# Altium PCB SS_MB_CONV2.0.PcbDoc (part 3 of 4)
Units mil, origin at the board's own origin, x right, y up, seen from the top; angles counter-clockwise.
Board outline 5818.45 x 4760.12 mil, 4 copper layers (Top Layer, Internal Plane 1, Internal Plane 2, Bottom Layer), stack 30.634 mil thick; 381 components, 398 nets, 1514 pads, 801 vias.
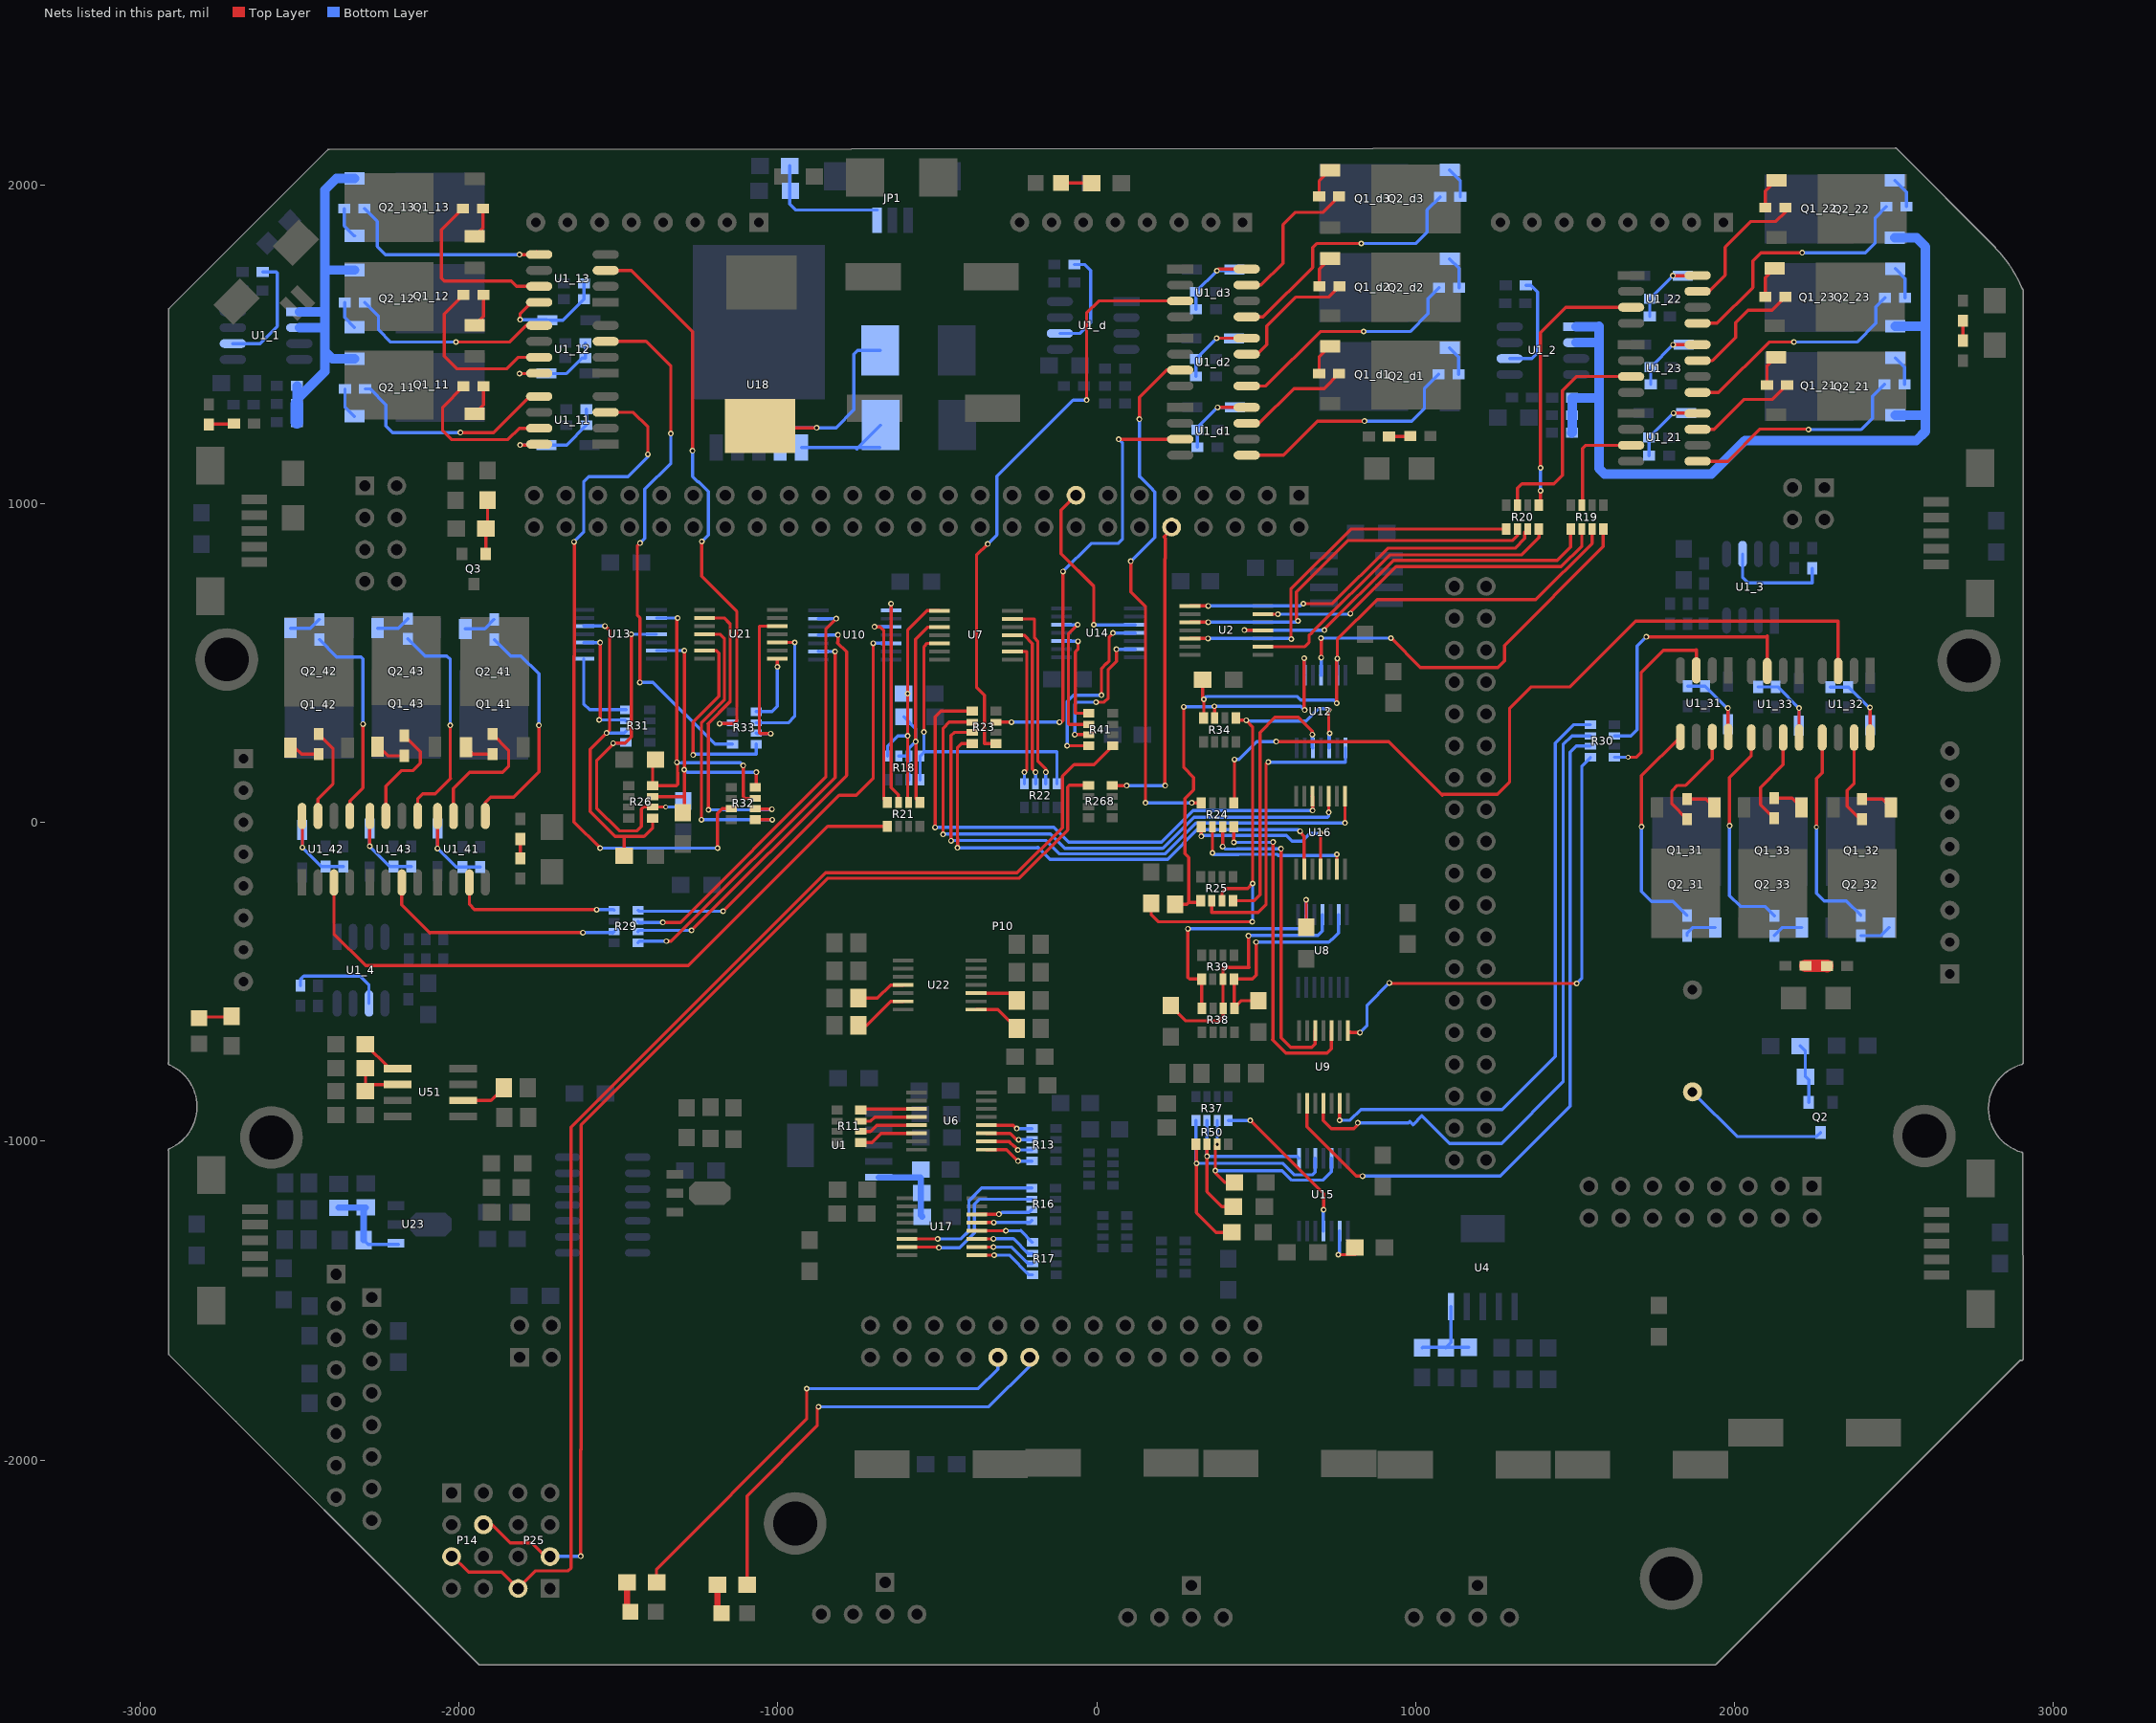
[diagram p5: the nets of this part, all layers, seen from the top]

## Via types
v1: diameter 18, hole 10, Top Layer to Bottom Layer, 606 vias
v2: diameter 25, hole 12, Top Layer to Bottom Layer, 77 vias
v3: diameter 15, hole 10, Top Layer to Bottom Layer, 44 vias
v4: diameter 20, hole 12, Top Layer to Bottom Layer, 43 vias
v5: diameter 50, hole 30, Top Layer to Bottom Layer, 28 vias
v6: diameter 30, hole 20, Top Layer to Bottom Layer, 1 vias
v7: diameter 40, hole 25, Top Layer to Bottom Layer, 1 vias
v8: diameter 30, hole 16, Top Layer to Bottom Layer, 1 vias

## Nets (pads, with @x,y where several pads share a name; then routed paths per layer and width w, separated by ;. In a path a pad name is that pad's centre, name@x,y a point inside that pad or via, vN(x,y) a via of type N, cw(c..) or ccw(c..) an arc to the next point about the centre after c; other vN are vias at no path point) (continued)
LED1: P10.81 R49.1 | length 1467.4
  Top Layer w10: R49.1@-1380.93,-2384 -1380.93,-2342.93 -910,-1872 v1(-910,-1776)
  Bottom Layer w10: v1@-912,-1776 v1(-910,-1776) -371,-1776 -310.19,-1715.19 P10.81@-310.19,-1677.85
LED2: P10.83 R47.1 | length 1394.8
  Top Layer w10: R47.1@-1096.93,-2392 -1096.93,-2113.07 -876.86,-1893 -876.86,-1836.86 v1(-873,-1833)
  Bottom Layer w10: v1(-873,-1833) -338,-1833 -210.19,-1705.19 P10.83@-210.19,-1677.85
Lin_11: R32.5 U1_11.3 | length 2206.2
  Top Layer w10: v1(-1640,881) -1639,880 -1639,523.26 -1640,522.26 -1640,2.1 v1(-1558,-79.9) ; U1_11.3@-1540.34,1287.36 -1454,1287.36 -1409.64,1243 -1408,1243 v1(-1408,1156) ; v1(-1189.64,-79.9) -1189.64,29.36 -1175,44 R32.5@-1146,44
  Bottom Layer w10: v1(-1640,881) -1609.41,911.59 -1609.41,1069.59 -1593.32,1085.68 -1470.32,1085.68 -1408,1148 v1(-1408,1156) ; v1(-1558,-79.9) v1(-1189.64,-79.9) v1@-1188,-78.26
Lin_12: R33.1 U1_12.3 | length 1646.1
  Top Layer w10: U1_12.3@-1540.34,1510 -1414,1510 -1336,1432 v1(-1336,1221) ; v1(-1433,440) -1433,494.85 -1432.85,495 -1432.85,642 -1441,650.15 -1441,869 v1(-1432.85,877.15)
  Bottom Layer w10: v1(-1433,440) -1392,440 -1198,246 R33.1@-1142.8,246 ; v1(-1432.85,877.15) -1418,892 -1418,1046 -1336,1128 v1(-1336,1221)
Lin_13: R33.5 U1_13.3 | length 1751.9
  Top Layer w10: U1_13.3@-1540.34,1732.64 -1460.14,1732.64 -1268,1540.5 v1(-1268,1167) ; v1(-1239,882) -1239,773 -1129,663 -1129,318 -1136.5,310.5 v1(-1183,310.5)
  Bottom Layer w10: v1(-1268,1167) -1268,1086 -1250.68,1068.68 -1247.99,1068.68 -1218.31,1039 -1218.31,902.69 v1(-1239,882) v1@-1241,880 ; v1(-1183,310.5) -1145.3,310.5 R33.5@-1142.8,313
Lin_21: R19.4 U1_21.3 | length 334.7
  Top Layer w10: R19.4@1524,995.8 1524,1174 1534,1184 U1_21.3@1676.34,1184
Lin_22: R20.8 U1_22.3 | length 862.7
  Top Layer w10: R20.8@1387,995.8 1392,1000.8 v1(1392,1041) ; v1(1392,1113) 1392,1538 1471,1617 U1_22.3@1676.34,1617
  Bottom Layer w10: v1(1392,1113) v1(1392,1041) v1@1393,1042
Lin_23: R20.4 U1_23.3 | length 710.6
  Top Layer w10: R20.4@1320,995.8 1320,1049 1334,1063 1434,1063 1461,1090 1461,1356 1504.7,1399.7 U1_23.3@1676.34,1399.7
Lin_31: R30.2 U1_31.3 | length 609.3
  Top Layer w10: v3(1667,205) 1692,205 1708.14,221.14 1708.14,471.64 1777.5,541 1879,541 1881,543 U1_31.3@1881,477.6
  Bottom Layer w10: R30.2@1623.8,205 v3(1667,205)
Lin_32: R24.8 U1_32.3 | length 2647.7
  Top Layer w10: R24.8@430,61.8 437,68.8 432,73.8 v1(432,198) ; v1(563,254) 915.85,254 1084,85.85 1084,89 1257,89 1295,127 1295,358 1363,426 1485,426 1690.94,631.94 2326,631.94 U1_32.3@2326,475.61
  Bottom Layer w10: v1(432,198) 446,198 502,254 v1(563,254)
Lin_33: R30.6 U1_33.3 | length 874.1
  Top Layer w10: v1(1724,583) 2100.36,583 2103.36,586 U1_33.3@2103.36,475.61
  Bottom Layer w10: R30.6@1623.8,272 1676,272 1695,291 1695,554 v1(1724,583)
Lin_41: R29.7 U1_41.3 | length 530.4
  Top Layer w10: U1_41.3@-1968,-188 -1968,-256.96 -1951.96,-273 v1(-1569,-273)
  Bottom Layer w10: v1(-1569,-273) -1516,-273 R29.7@-1514,-275
Lin_42: R21.1 U1_42.3 | length 2119.5
  Top Layer w10: U1_42.3@-2393,-188 -2393,-349 -2293,-449 -1281.08,-449 -843.89,-11.8 R21.1@-657,-11.8
Lin_43: R29.3 U1_43.3 | length 774.6
  Top Layer w10: U1_43.3@-2180,-188 -2180,-257.5 -2091.5,-346 -2090.5,-345 v1(-1612,-345)
  Bottom Layer w10: v1(-1612,-345) -1519,-345 -1518,-346 R29.3@-1514,-342
Lin_d1: R23.4 U1_d1.3 | length 1423.1
  Top Layer w10: R23.4@-316,315 v1(-267.19,315) v1@-265.19,313 ; v1(-117,315) -111,315 -106,320 v1(-106,788) ; v1(69,1203) 152.96,1203 153,1202.96 U1_d1.3@262,1202.96
  Bottom Layer w10: v1(-267.19,315) v1(-117,315) ; v1(-106,788) -18,876 67,876 81,890 81,1191 v1(69,1203)
Lin_d2: R24.2 U1_d2.3 | length 1681.9
  Top Layer w10: v1(107,820) 107,723.04 153,677.04 v1(153,62) ; v1(134,1266) 134,1335 218.96,1419.96 U1_d2.3@262,1419.96 ; v1(298,62) 327.8,62 R24.2@328,61.8
  Bottom Layer w10: v1(107,820) 182,895 182,1038 176.34,1043.66 176.34,1044.35 135.01,1085.68 134,1085.68 v1(134,1266) ; v1(153,62) v1(298,62)
Lin_d3: R23.8 U1_d3.3 | length 1874.6
  Top Layer w10: v1(-342,874) -377,839 -377,425 -352,400 -352,248 R23.8@-316,248 ; v1(-32,1326) -32,1599 5.96,1636.96 U1_d3.3@262,1636.96
  Bottom Layer w10: v1(-342,874) -313,903 -313,1087 -74,1326 v1(-32,1326)
MISO: P14.5 P25.2 R41.8 | length 4126.8
  Top Layer w10: P14.5@-2023.83,-2303.22 -2023.83,-2299.05 -1970.88,-2352 -1866.22,-2352 P25.2@-1815,-2403.22 P25.2@-1815,-2403.22 -1759.73,-2347.88 -1657.66,-2347.88 -1649,-2339.22 -1649,-956 -850.5,-157.5 -249.5,-157.5 -108,-16 -108,145.2 -70.86,182.34 -8.86,182.34 R41.8@49.8,241
  Bottom Layer w10: P14.5@-2023.83,-2303.22 P14.5@-2018,-2303.22
MISO_F: P10.15 U14.10 | length 598.9
  Top Layer w10: P10.15@-65.19,1027.15 -65.19,1026.81 -112,980 -112,844 -9,741 v1(-9,621)
  Bottom Layer w10: v1(-9,621) -8.59,620.59 U14.10@118,620.59 U14.10@121.5,620.59
MOSI: P14.4 P25.3 R268.8 | length 3813.5
  Top Layer w10: P14.4@-1923.83,-2203.22 -1897,-2203.22 -1840,-2260.22 -1772,-2260.22 -1729,-2303.22 P25.3@-1715,-2303.22 ; v1(-1619,-2302.22) -1619,-1967 ; -1618,-1968 -1618,-949.04 -843.46,-174.5 -242.46,-174.5 -91,-23.04 -91,112 -86,117 R268.8@-26,117
  Bottom Layer w10: P25.3@-1715,-2303.22 -1714,-2302.22 v1(-1619,-2302.22)
MOSI_F: P10.10 R268.7 | length 990.9
  Top Layer w10: R268.7@48.8,117 49.8,116 v1(94,116) ; v1(215,116) 214,117 214,828.08 215,829.08 215,891.96 210,896.96 234.81,921.77 P10.10@234.81,927.15
  Bottom Layer w10: v1(94,116) v1(215,116)
NetC1_11_1: C1_11.1 C2_11.1 D1_11.K U1_11.8 | length 344.7
  Top Layer w10: v1(-1809,1185) -1751.36,1185 U1_11.8@-1749,1187.36
  Bottom Layer w10: v1(-1809,1185) D1_11.K@-1725.86,1185 -1663,1185 C2_11.1@-1601,1247 C1_11.1@-1601,1297
NetC1_12_1: C1_12.1 C2_12.1 D1_12.K U1_12.8 | length 336.7
  Top Layer w10: v1(-1811,1409) -1750,1409 U1_12.8@-1749,1410
  Bottom Layer w10: v1(-1811,1409) D1_12.K@-1725.86,1409 -1663.24,1409 -1614.24,1458 C1_12.1@-1604,1458 C2_12.1@-1604,1505
NetC1_13_1: C1_13.1 C2_13.1 D1_13.K U1_13.8 | length 371.8
  Top Layer w10: v1(-1809,1578) -1809,1596 -1772.36,1632.64 U1_13.8@-1749,1632.64
  Bottom Layer w10: v1(-1809,1578) -1724.86,1578 D1_13.K@-1722.86,1576 -1674.5,1576 C2_13.1@-1608.5,1642 C1_13.1@-1608.5,1692
NetC1_21_1: C1_21.1 C2_21.1 D1_21.K U1_21.8 | length 279.9
  Top Layer w10: v1(1809.66,1285) 1884,1285 U1_21.8@1885,1284
  Bottom Layer w10: C2_21.1@1732.5,1152 1733.16,1152.66 C1_21.1@1733.16,1208.5 v1(1809.66,1285) D1_21.K@1848.86,1285
NetC1_22_1: C1_22.1 C2_22.1 D1_22.K U1_22.8 | length 267.4
  Top Layer w10: v1(1807.5,1716) 1884,1716 U1_22.8@1885,1717
  Bottom Layer w10: C2_22.1@1735,1588 1735,1643.5 C1_22.1@1735.5,1644 v1(1807.5,1716) D1_22.K@1839,1716
NetC1_23_1: C1_23.1 C2_23.1 D1_23.K U1_23.8 | length 265
  Top Layer w10: v1(1808,1499.7) U1_23.8@1885,1499.7
  Bottom Layer w10: C1_23.1@1738,1374.7 C2_23.1@1738,1429.7 v1(1808,1499.7) D1_23.K@1842,1499.7
NetC1_31_1: C1_31.1 C2_31.1 D1_31.K U1_31.8 | length 296.2
  Top Layer w10: v1(1980,359) 1980,269.94 U1_31.8@1981,268.94
  Bottom Layer w10: C1_31.1@1853.7,427.94 C2_31.1@1908.7,427.94 1977.64,359 v1(1980,359) D1_31.K@1980,308.08
NetC1_32_1: C1_32.1 C2_32.1 D1_32.K U1_32.8 | length 297.7
  Top Layer w10: U1_32.8@2426,266.95 v1(2426,361.2)
  Bottom Layer w10: C1_32.1@2301.7,424.94 C2_32.1@2356.7,424.94 2358.26,424.94 2426,357.2 D1_32.K@2426,306.08
NetC1_33_1: C1_33.1 C2_33.1 D1_33.K U1_33.8 | length 303.5
  Top Layer w10: v1(2203,359.2) 2203,267.31 U1_33.8@2203.36,266.95
  Bottom Layer w10: C1_33.1@2074.7,425.94 C2_33.1@2129.7,425.94 2136.26,425.94 v1(2203,359.2) D1_33.K@2203,304.08
NetC1_41_1: C1_41.1 C2_41.1 D1_41.K U1_41.8 | length 321.8
  Top Layer w10: v1(-2068,-81) U1_41.8@-2068,20.66
  Bottom Layer w10: D1_41.K@-2068,-18.14 v1(-2068,-81) -2010,-139 C2_41.1@-1989.7,-139 C1_41.1@-1934.7,-139
NetC1_42_1: C1_42.1 C2_42.1 D1_42.K U1_42.8 | length 307.5
  Top Layer w10: U1_42.8@-2493,20.66 -2492,19.66 v1(-2492,-78.26)
  Bottom Layer w10: D1_42.K@-2492,-23.14 v1(-2492,-78.26) -2432.26,-138 C2_42.1@-2418.7,-138 C1_42.1@-2363.7,-138
NetC1_43_1: C1_43.1 C2_43.1 D1_43.K U1_43.8 | length 307.2
  Top Layer w10: v1(-2281,-74.26) -2281,19.66 U1_43.8@-2280,20.66
  Bottom Layer w10: D1_43.K@-2281,-19.14 v1(-2281,-74.26) -2217.26,-138 C2_43.1@-2205.7,-138 C1_43.1@-2150.7,-138
NetC1_d1_1: C1_d1.1 C2_d1.1 D1_d1.K U1_d1.8 | length 298
  Top Layer w10: v1(378.88,1303) v1(378.88,1303) U1_d1.8@470.66,1302.96
  Bottom Layer w10: C1_d1.1@316,1178 C2_d1.1@316,1233 316,1240.12 v1(378.88,1303) D1_d1.K@434,1303
NetC1_d2_1: C1_d2.1 C2_d2.1 D1_d2.K U1_d2.8 | length 296.4
  Top Layer w10: v1(376.26,1519.96) U1_d2.8@470.66,1519.96
  Bottom Layer w10: C1_d2.1@311,1399.7 C2_d2.1@311,1454.7 v1(376.26,1519.96) D1_d2.K@431,1519.96
NetC1_d3_1: C1_d3.1 C2_d3.1 D1_d3.K U1_d3.8 | length 301.1
  Top Layer w10: v1(376.88,1731.58) 382.26,1736.96 U1_d3.8@470.66,1736.96
  Bottom Layer w10: C1_d3.1@311,1610.7 C2_d3.1@311,1665.7 v1(376.88,1731.58) 427.58,1731.58 D1_d3.K@432,1736
NetC7_2: C7.2 R2.2 R8.1 U1.5 | length 256.9
  Bottom Layer w20: U1.5@-684,-1113 -554,-1113 -552,-1115 -552,-1232 R8.1@-547,-1237
NetC18_1: C18.1 JP1.1 R167.1 | length 402
  Bottom Layer w10: R167.1@-963.36,2060.76 -963.36,1985.36 -963,1985 -963,1941 -944.2,1922.2 JP1.1@-688.7,1922.2
NetC44_1: C44.1 R18.3 R18.5 R18.6 R21.8 U7.3 | length 862.2
  Top Layer w10: R21.8@-555,63 -567.17,75.17 -567.17,253.17 v1(-568,254) -568,575 -529.41,613.59 U7.3@-493,613.59
  Bottom Layer w10: R18.3@-621,209 R18.5@-589,209 ; C44.1@-605,332 -568,295 v1(-568,254) -589,233 R18.5@-589,209 ; R18.6@-589,134.2 R18.5@-589,209
NetC52_1: C52.1 R19.5 R34.2 U12.13 | length 1781.9
  Top Layer w10: C52.1@332,448 332,383.81 335.19,387 v1(336,387) 336,328.8 R34.2@335,327.8 ; v1(753,375) 753,513 v1(755,515) 755,574.18 754.59,574.59 879.62,699.62 1377.62,699.62 1554,876 R19.5@1554,921
  Bottom Layer w10: v1(336,387) 345,396 628.01,396 639.98,384.02 743.98,384.02 v1(753,375) ; U12.13@754.59,462.5 755,462.09 v1(755,515)
NetC53_1: C53.1 R25.5 R34.8 U12.3 | length 1620.4
  Top Layer w10: C53.1@171,-253 171,-290 192,-311 v1(488,-311) ; R25.5@393,-245 393,-220.28 406.28,-207 473,-207 v1(489,-191) 489,301 v1(469,321) 443.8,321 R34.8@437,327.8 ; v1(728,354) 728,281 729,280 v1(731,280)
  Bottom Layer w10: v1(469,321) 472,318 656.85,318 695.85,357 725,357 v1(728,354) ; v1(488,-311) 489,-310 v1(489,-191) ; U12.3@729,238 731,240 v1(731,280) 729,278 U12.3@729,238 ; U12.3@729,238 U12.3@729,234 731,236 U12.3@729,238
NetC54_1: C54.1 R18.1 R21.6 U7.1 | length 794.8
  Top Layer w10: U7.1@-493,664.77 -532.82,664.77 -593,604.59 v1(-593,405) v1(-593,272) R21.6@-593,76.96 ; R21.6@-593,76.96 -593,66 R21.6@-590,63 -584.52,68.48 R21.6@-593,76.96
  Bottom Layer w10: R18.1@-656,209 -656,240 -624,272 v1(-593,272)
NetC55_1: C55.1 R25.1 R34.4 U12.9 | length 1368.3
  Top Layer w10: C55.1@246,-256 283,-256 289,-250 ; v1(273,363) 273,173.04 304,142.04 304,103 277,76 277,-96 276,-97 289,-110 289,-250 ; R25.1@326,-245 321,-250 289,-250 ; v1(369,365) 370,364 R34.4@370,327.8 ; v1(650.82,516) 650.82,354.18 v1(652,353)
  Bottom Layer w10: v1(273,363) 368.54,363 369,363.46 v1(369,365) 640,365 v1(652,353) ; v1(650.82,516) 650.82,463.91 U12.9@652.23,462.5
NetC57_1: C57.1 R37.6 R50.4 U15.5 | length 668.2
  Top Layer w10: v1(378,-1009.61) 372,-1015.61 v1(372,-1092) 372,-1098 403.28,-1129.28 C57.1@432,-1129.28
  Bottom Layer w10: v1(372,-1092) 581.96,-1092 611.96,-1122 709.41,-1122 736.41,-1095 U15.5@736.41,-1053.5 ; v1(378,-1009.61) R37.6@378,-934.8
NetC58_1: C58.1 R26.7 R32.4 U13.9 | length 1106
  Top Layer w10: C58.1@-1384,197 -1393,188 R26.7@-1393,116 -1319,116 -1314.82,120.18 -1314.82,157.12 -1315,157.3 -1315,188.82 -1315.18,189 v1(-1317,189) -1317,640 v1(-1314.82,642.18) ; v1(-1109,179) -1109,82 -1103,76 R32.4@-1071.2,76
  Bottom Layer w10: U13.9@-1381,642.18 v1(-1314.82,642.18) ; v1(-1317,189) -1315,187 -1303.28,187 -1302.28,188 -1118,188 v1(-1109,179)
NetC59_1: C59.1 R38.2 R39.1 U8.9 | length 839.1
  Top Layer w10: v1(286,-333) 286,-486 291,-491 R39.1@329,-491 329,-582 R38.2@330,-583 ; v1(656.64,-242.36) 657,-242.72 C59.1@657,-329
  Bottom Layer w10: v1(286,-333) 657,-333 657,-288.86 U8.9@656.64,-288.5 v1(656.64,-242.36)
NetC60_1: C60.1 R26.5 R32.2 U13.13 | length 974.7
  Top Layer w10: R26.5@-1393,81 -1293.68,81 ; C60.1@-1298,31.13 -1293.68,35.45 -1293.68,81 ; v1(-1293.68,539.82) -1293.68,81 ; R32.2@-1071.2,111 -1068,114.2 v1(-1068,158)
  Bottom Layer w10: U13.13@-1381,539.82 v1(-1293.68,539.82) ; v1(-1294,166) -1292,166 -1284,158 v1(-1068,158)
NetC61_1: C61.1 R37.4 R50.6 U15.1 | length 652.8
  Top Layer w10: R50.6@346,-1009.61 v1(346,-1047) 346,-1158 393,-1205 C61.1@428,-1205
  Bottom Layer w10: R37.4@346,-934.8 v1(346,-1047) 627.55,-1047 U15.1@634.05,-1053.5
NetC62_1: C62.1 R26.3 R31.8 U13.11 | length 1098.6
  Top Layer w10: v1(-1460,591) -1460,561.21 -1460.21,561 -1460.21,268.59 -1479.8,249 v1(-1517,249) -1517,246 -1569,194 -1569,44.86 -1498.14,-26 -1442,-26 -1428,-12 -1428,43 -1422,49 R26.3@-1393,49 v3(-1352,49)
  Bottom Layer w10: v1(-1517,249) -1479.8,249 R31.8@-1476.8,252 ; v1@-1461,590 v1(-1460,591) U13.11@-1381,591 ; v3(-1352,49) C62.1@-1298,49
NetC63_1: C63.1 R37.2 R50.8 U15.3 | length 922.8
  Top Layer w10: R50.8@311,-1009.61 313,-1011.61 v1(313,-1069) 313,-1223 312,-1224 374,-1286 C63.1@424,-1286
  Bottom Layer w10: R37.2@311,-934.8 311,-1068 312,-1069 v1(313,-1069) 583,-1069 619,-1105 677,-1105 685.23,-1096.77 U15.3@685.23,-1053.5
NetC64_1: C64.1 R26.1 R31.6 U13.5 | length 1075.8
  Top Layer w10: v1(-1543,617) -1528,602 -1528,291 v1(-1538,281) -1589,230 -1589,34.59 -1511.41,-43 -1485,-43 ; C64.1@-1482,-104 -1482,-46 -1485,-43 ; R26.1@-1393,14 -1393,-16 -1420,-43 -1485,-43
  Bottom Layer w10: U13.5@-1609.5,616.59 -1609.09,617 v1(-1543,617) ; v1(-1538,281) -1482.8,281 R31.6@-1476.8,287
NetC65_1: C65.1 R38.8 R39.7 U8.13 | length 683.9
  Top Layer w10: v1(500,-375) 500,-479 488,-491 R39.7@431,-491 431,-582 454.15,-558.85 C65.1@507,-558.85
  Bottom Layer w10: v1(500,-375) 728,-375 736,-367 737,-368 759,-346 U8.13@759,-288.5
NetC66_1: C66.1 R38.6 R39.5 U8.11 | length 816
  Top Layer w10: C66.1@232,-574 280,-622 383,-622 397,-608 R38.6@397,-583 396,-582 R39.5@396,-491 396,-456 397,-455 478,-455 476,-453 v1(476,-355)
  Bottom Layer w10: v1(476,-355) 477,-354 694,-354 707.82,-340.18 U8.11@707.82,-288.5
NetC68_2: C68.2 R46.2 R48.1 U4.5 | length 282.5
  Bottom Layer w10: R48.1@1021,-1648 1023,-1646 R46.2@1097,-1646 ; R46.2@1095,-1648 R46.2@1097,-1646 ; U4.5@1111,-1519 1111,-1632 R46.2@1097,-1646 ; C68.2@1167,-1646 R46.2@1097,-1646
NetC75_1: C75.1 R93.1 R94.2 U23.1 | length 302.1
  Bottom Layer w10: R94.2@-2299.6,-1310 -2285.6,-1324 U23.1@-2191.25,-1324
  Bottom Layer w20: R93.1@-2378,-1208.4 -2294,-1208.4 -2299.6,-1214 C75.1@-2299.6,-1232 ; R94.2@-2299.6,-1310 C75.1@-2299.6,-1232 ; C75.1@-2299.54,-1232.06 C75.1@-2299.6,-1232
NetC80_1_2: C80_1.2 U1_1.6 | length 376.5
  Bottom Layer w10: U1_1.6@-2710,1503 -2625,1503 -2570.5,1557.5 -2570.5,1724.5 -2574,1728 C80_1.2@-2616.5,1728
NetC80_2_2: C80_2.2 U1_2.6 | length 331.8
  Bottom Layer w10: U1_2.6@1295.34,1456 1365,1456 1383,1474 1383,1665 1362,1686 C80_2.2@1346,1686
NetC80_3_2: C80_3.2 U1_3.6 | length 345.9
  Bottom Layer w10: U1_3.6@2026,842.94 2026,770 2044.06,751.94 2245,751.94 ; 2245,751.44 2245,751.94 ; C80_3.2@2245,797.94 2245,751.94
NetC80_4_2: C80_4.2 U1_4.6 | length 308.8
  Bottom Layer w10: C80_4.2@-2497.9,-512 -2497.9,-491.9 -2487.5,-481.5 -2311.5,-481.5 -2283.04,-509.96 U1_4.6@-2283.04,-567.66
NetC80_d_2: C80_d.2 U1_d.6 | length 333.2
  Bottom Layer w10: U1_d.6@-115.66,1535 -53,1535 -19,1569 -19,1733 -37,1751 C80_d.2@-70,1751
NetD1_2: D1.2 U18.1 | length 351.4
  Bottom Layer w10: U18.1@-926.14,1176.66 -748.42,1176.66 ; -753.42,1171.66 -748.42,1176.66 ; D1.2@-681.42,1176.66 -748.42,1176.66 ; D1.2@-678,1247.08 -748.42,1176.66
NetD4_2: D4.2 L1.1 U18.2 | length 756.6
  Top Layer w10: L1.1@-1056.5,1245 -1044.5,1257 -1026.5,1239 v1(-879,1239)
  Bottom Layer w10: U18.2@-993.07,1176.66 -993.07,1216.93 -971,1239 v1(-879,1239) -818,1239 -762,1295 -762,1470 -749.92,1482.08 D4.2@-679,1482.08
NetDS1_1: DS1.1 R6.2 | length 95.7
  Top Layer w10: DS1.1@-111.73,2006.96 R6.2@-16,2006.96
NetDS2_2: DS2.2 R49.2 | length 96.6
  Top Layer w20: R49.2@-1473.93,-2384 -1473.93,-2465 DS2.2@-1462.93,-2476
NetDS3_2: DS3.2 R47.2 | length 94.4
  Top Layer w20: R47.2@-1189.93,-2392 -1189.93,-2468 DS3.2@-1176.93,-2481
NetDS4_1: DS4.1 R272.1 | length 92
  Top Layer w10: DS4.1@-2803,-610 R272.1@-2711,-610
NetLED1_1_2: LED1_1.2 R105_1.2 | length 74
  Top Layer w10: R105_1.2@-2782,1250.5 LED1_1.2@-2708,1250.5
NetLED1_2_2: LED1_2.2 R105_2.2 | length 62
  Top Layer w10: R105_2.2@2717,1512.5 LED1_2.2@2717,1574.5
NetLED1_3_2: LED1_3.2 R105_3.2 | length 68.4
  Top Layer w40: LED1_3.2@2223.5,-449.06 2290.5,-449.06 R105_3.2@2291.5,-450.06
NetLED1_4_2: LED1_4.2 R105_4.2 | length 61
  Top Layer w10: R105_4.2@-1807.73,-112.4 LED1_4.2@-1807.73,-51.4
NetLED1_d_2: LED1_d.2 R105_d.2 | length 67.4
  Top Layer w10: R105_d.2@917,1212 983,1212 LED1_d.2@984,1213
NetLS1_2: LS1.2 Q2.3 | length 455.4
  Bottom Layer w10: LS1.2@1876,-852 2009,-985 2258.24,-985 Q2.3@2271,-972.24
NetQ1_11_1: Q1_11.1 R1_11.2 | length 97.4
  Top Layer w10: Q1_11.1@-1951,1283.04 -1923.5,1310.54 R1_11.2@-1923.5,1369
NetQ1_12_1: Q1_12.1 R1_12.2 | length 106.4
  Top Layer w10: Q1_12.1@-1951,1561 -1923.5,1588.5 R1_12.2@-1923.5,1656
NetQ1_13_1: Q1_13.1 R1_13.2 | length 97.6
  Top Layer w10: Q1_13.1@-1951,1840 -1925.5,1865.5 R1_13.2@-1925.5,1927
NetQ1_21_1: Q1_21.1 R1_21.2 | length 98.7
  Top Layer w10: R1_21.2@2102.5,1373 2102.5,1431.74 Q1_21.1@2130.76,1460
NetQ1_22_1: Q1_22.1 R1_22.2 | length 100.2
  Top Layer w10: R1_22.2@2097.5,1930 2097.5,1981.42 Q1_22.1@2132,2015.92
NetQ1_23_1: Q1_23.1 R1_23.2 | length 100.8
  Top Layer w10: R1_23.2@2097.5,1650 2097.5,1710.5 Q1_23.1@2126,1739
NetQ1_31_1: Q1_31.1 R1_31.2 | length 95.6
  Top Layer w10: R1_31.2@1852,73.44 1911.5,73.44 Q1_31.1@1937,47.94
NetQ1_32_1: Q1_32.1 R1_32.2 | length 100.9
  Top Layer w10: R1_32.2@2400.96,73.44 2464.58,73.44 Q1_32.1@2490.92,47.1
NetQ1_33_1: Q1_33.1 R1_33.2 | length 98.2
  Top Layer w10: R1_33.2@2125,76.44 2181.5,76.44 Q1_33.1@2211,46.94
NetQ1_41_1: Q1_41.1 R1_41.2 | length 92.9
  Top Layer w10: Q1_41.1@-1979,236 -1957.5,214.5 R1_41.2@-1895,214.5
NetQ1_42_1: Q1_42.1 R1_42.2 | length 97.4
  Top Layer w10: Q1_42.1@-2529.92,235 -2514.6,235 -2494.1,214.5 R1_42.2@-2441,214.5
NetQ1_43_1: Q1_43.1 R1_43.2 | length 95.8
  Top Layer w10: Q1_43.1@-2255.96,238.16 -2252.16,238.16 -2223.65,209.65 R1_43.2@-2172,209.65
NetQ1_d1_1: Q1_d1.1 R1_d1.2 | length 100.2
  Top Layer w10: R1_d1.2@697.5,1409 697.5,1460.42 Q1_d1.1@732,1494.92
NetQ1_d2_1: Q1_d2.1 R1_d2.2 | length 100.8
  Top Layer w10: R1_d2.2@698.5,1683 698.5,1736.42 Q1_d2.1@732,1769.92
NetQ1_d3_1: Q1_d3.1 R1_d3.2 | length 96.3
  Top Layer w10: R1_d3.2@697.5,1965 697.5,2012.5 Q1_d3.1@732,2047
NetQ2_1: Q2.1 R3.2 R4.1 | length 187.8
  Bottom Layer w10: R3.2@2207,-701 2223,-717 R4.1@2223,-797 2233.6,-807.6 Q2.1@2233.6,-877.76
NetQ2_11_1: Q2_11.1 R2_11.2 | length 98.2
  Bottom Layer w10: R2_11.2@-2358.5,1361 -2358.5,1304.74 Q2_11.1@-2328.84,1275.08
NetQ2_12_1: Q2_12.1 R2_12.2 | length 90.7
  Bottom Layer w10: R2_12.2@-2359.46,1632 -2359.46,1584.62 Q2_12.1@-2328.84,1554
NetQ2_13_1: Q2_13.1 R2_13.2 | length 100
  Bottom Layer w10: R2_13.2@-2360.5,1927 -2360.5,1872.7 Q2_13.1@-2328.84,1841.04 Q2_13.1@-2327.96,1841.04
NetQ2_21_1: Q2_21.1 R2_21.2 | length 95.2
  Bottom Layer w10: Q2_21.1@2505,1458 2534.5,1428.5 R2_21.2@2534.5,1375
NetQ2_22_1: Q2_22.1 R2_22.2 | length 97
  Bottom Layer w10: Q2_22.1@2504,2014.92 2540.5,1978.42 R2_22.2@2540.5,1933
NetQ2_23_1: Q2_23.1 R2_23.2 | length 103.6
  Bottom Layer w10: Q2_23.1@2505,1737.92 2535.5,1707.42 R2_23.2@2535.5,1647
NetQ2_31_1: Q2_31.1 R2_31.2 | length 102.4
  Bottom Layer w10: R2_31.2@1852,-354.56 1852,-348.06 1871,-329.06 Q2_31.1@1940,-329.06
NetQ2_32_1: Q2_32.1 R2_32.2 | length 99.5
  Bottom Layer w10: R2_32.2@2397,-354.56 2460.42,-354.56 Q2_32.1@2485.92,-329.06
NetQ2_33_1: Q2_33.1 R2_33.2 | length 96.4
  Bottom Layer w10: R2_33.2@2126,-354.06 2151,-329.06 Q2_33.1@2212.08,-329.06
NetQ2_41_1: Q2_41.1 R2_41.2 | length 103.3
  Bottom Layer w10: Q2_41.1@-1980.96,607.69 -1919.81,607.69 R2_41.2@-1890,637.5
NetQ2_42_1: Q2_42.1 R2_42.2 | length 101.4
  Bottom Layer w10: Q2_42.1@-2528.96,609.84 -2466.66,609.84 R2_42.2@-2439,637.5
NetQ2_43_1: Q2_43.1 R2_43.2 | length 107.3
  Bottom Layer w10: Q2_43.1@-2255.96,609.84 -2190.9,609.84 R2_43.2@-2161,639.74
NetQ2_d1_1: Q2_d1.1 R2_d1.2 | length 94.7
  Bottom Layer w10: Q2_d1.1@1107,1489.92 1135.5,1461.42 R2_d1.2@1135.5,1407
NetQ2_d2_1: Q2_d2.1 R2_d2.2 | length 103.1
  Bottom Layer w10: Q2_d2.1@1107,1768.92 1136.5,1739.42 R2_d2.2@1136.5,1678
NetQ2_d3_1: Q2_d3.1 R2_d3.2 | length 97.8
  Bottom Layer w10: Q2_d3.1@1107,2047.92 1140.5,2014.42 R2_d3.2@1140.5,1964
NetQ3_1: Q3.1 R5.2 R7.1 | length 171.8
  Top Layer w10: Q3.1@-1916.6,842.49 -1916,843.09 R7.1@-1916,923 -1911,928 R5.2@-1911,1012
NetR1_11_1: R1_11.1 U1_11.7 | length 495.4
  Top Layer w10: R1_11.1@-1986.5,1369 -2052,1303.5 -2052,1230 -2024,1202 -1847,1202 -1811.64,1237.36 U1_11.7@-1749,1237.36
NetR1_12_1: R1_12.1 U1_12.7 | length 547.1
  Top Layer w10: R1_12.1@-1986.5,1656 -2047,1595.5 -2047,1463 -2008,1424 -1850,1424 -1814,1460 U1_12.7@-1749,1460
NetR1_13_1: R1_13.1 U1_13.7 | length 564.5
  Top Layer w10: R1_13.1@-1988.5,1927 -2056,1859.5 -2056,1708 -2047,1699 -1837,1699 -1820.64,1682.64 U1_13.7@-1749,1682.64
NetR1_21_1: R1_21.1 U1_21.7 | length 338.1
  Top Layer w10: U1_21.7@1885,1234 1937,1234 2031,1328 2120.5,1328 R1_21.1@2165.5,1373
NetR1_22_1: R1_22.1 U1_22.7 | length 443.8
  Top Layer w10: U1_22.7@1885,1667 1920,1667 1971,1718 1971,1805.33 2052,1886.33 2130.85,1886.33 2160.5,1915.97 R1_22.1@2160.5,1930
NetR1_23_1: R1_23.1 U1_23.7 | length 386
  Top Layer w10: U1_23.7@1885,1449.7 1931.7,1449.7 2004,1522 2004,1569 2043,1608 2118.5,1608 R1_23.1@2160.5,1650
NetR1_31_1: R1_31.1 U1_31.7 | length 346.1
  Top Layer w10: R1_31.1@1852,10.44 1804,58.44 1804,98.78 1821.85,116.63 1847.69,116.63 1931,199.94 U1_31.7@1931,268.94
NetR1_32_1: R1_32.1 U1_32.7 | length 288.8
  Top Layer w10: U1_32.7@2376,266.95 2376,122.95 2354,100.94 2354,51 2394.56,10.44 R1_32.1@2400.96,10.44
NetR1_33_1: R1_33.1 U1_33.7 | length 300.9
  Top Layer w10: R1_33.1@2125,13.44 2082,56.44 2082,109.94 2153.36,181.31 U1_33.7@2153.36,266.95
NetR1_41_1: R1_41.1 U1_41.7 | length 410.1
  Top Layer w10: U1_41.7@-2018,20.66 -2018,107 -1967,158 -1863,158 -1845,176 -1845,227.5 R1_41.1@-1895,277.5
NetR1_42_1: R1_42.1 U1_42.7 | length 294.9
  Top Layer w10: U1_42.7@-2443,20.66 -2443,74 -2396,121 -2396,232.5 R1_42.1@-2441,277.5
NetR1_43_1: R1_43.1 U1_43.7 | length 338.5
  Top Layer w10: U1_43.7@-2230,20.66 -2230,115 -2181.96,163.04 -2145.96,163.04 -2122,187 -2122,222.65 R1_43.1@-2172,272.65
NetR1_d1_1: R1_d1.1 U1_d1.7 | length 354.5
  Top Layer w10: U1_d1.7@470.66,1252.96 509.96,1252.96 619,1362 713.5,1362 R1_d1.1@760.5,1409
NetR1_d2_1: R1_d2.1 U1_d2.7 | length 413.5
  Top Layer w10: U1_d2.7@470.66,1469.96 503.77,1469.96 533,1499.19 533,1558 624,1649 727.5,1649 R1_d2.1@761.5,1683
NetR1_d3_1: R1_d3.1 U1_d3.7 | length 475.9
  Top Layer w10: U1_d3.7@470.66,1686.96 515.96,1686.96 584,1755 584,1876 623,1915 710.5,1915 R1_d3.1@760.5,1965
NetR2_11_1: R2_11.1 U1_11.5 | length 688.9
  Top Layer w10: v1(-1996,1224) -1892,1224 -1778.64,1337.36 U1_11.5@-1749,1337.36
  Bottom Layer w10: R2_11.1@-2295.5,1361 -2280,1361 -2230,1311 -2230,1245 -2209,1224 v1(-1996,1224)
NetR2_12_1: R2_12.1 U1_12.5 | length 645.3
  Top Layer w10: v1(-2010,1508) -1842.72,1508 -1790.72,1560 U1_12.5@-1749,1560
  Bottom Layer w10: R2_12.1@-2296.46,1632 -2253,1588.54 -2253,1546 -2215,1508 v1(-2010,1508)
NetR2_13_1: R2_13.1 U1_13.5 | length 661.7
  Top Layer w10: v1(-1811,1782) -1766.36,1782 -1757.36,1791 U1_13.5@-1749,1782.64
  Bottom Layer w10: R2_13.1@-2297.5,1927 -2257,1886.5 -2257,1808 -2231,1782 v1(-1811,1782)
NetR2_21_1: R2_21.1 U1_21.5 | length 727.7
  Top Layer w10: U1_21.5@1885,1134 1980,1134 2081,1235 2231.5,1235 v1(2233,1233.5)
  Bottom Layer w10: v1(2233,1233.5) 2398.5,1233.5 2434,1269 2434,1337.5 R2_21.1@2471.5,1375
NetR2_22_1: R2_22.1 U1_22.5 | length 838.7
  Top Layer w10: U1_22.5@1885,1567 1946,1567 2058,1679 2058,1762 2084,1788 v1(2213,1788)
  Bottom Layer w10: v1(2213,1788) 2411,1788 2442,1819 2442,1897.5 R2_22.1@2477.5,1933
NetR2_23_1: R2_23.1 U1_23.5 | length 740.8
  Top Layer w10: U1_23.5@1885,1349.7 1950.7,1349.7 2109,1508 v1(2187,1508)
  Bottom Layer w10: v1(2187,1508) 2385,1508 2444,1567 2444,1618.5 R2_23.1@2472.5,1647
NetR2_31_1: R2_31.1 U1_31.5 | length 709.8
  Top Layer w10: v1(1709,-13.06) 1709,146.94 U1_31.5@1831,268.94
  Bottom Layer w10: v1(1709,-13.06) 1709,-216.06 1739.94,-247 1807.44,-247 R2_31.1@1852,-291.56
NetR2_32_1: R2_32.1 U1_32.5 | length 664.2
  Top Layer w10: v3(2258,-14.06) 2258,137.94 2276,155.95 U1_32.5@2276,266.95
  Bottom Layer w10: v3(2258,-14.06) 2258,-222 2282,-246 2351.44,-246 R2_32.1@2397,-291.56
NetR2_33_1: R2_33.1 U1_33.5 | length 691.6
  Top Layer w10: v1(1985,-10.06) 1985,141.81 2053.36,210.17 U1_33.5@2053.36,266.95
  Bottom Layer w10: v1(1985,-10.06) 1985,-229.06 2019,-263.06 2096.5,-263.06 R2_33.1@2126,-292.56
NetR2_41_1: R2_41.1 U1_41.5 | length 743.2
  Top Layer w10: U1_41.5@-1918,20.66 -1918,64 -1902,80 -1829,80 -1750,159 v1(-1750,305)
  Bottom Layer w10: R2_41.1@-1890,574.5 -1838.5,523 -1806,523 -1750,467 v1(-1750,305)
NetR2_42_1: R2_42.1 U1_42.5 | length 672.4
  Top Layer w10: U1_42.5@-2343,20.66 -2343,68 -2302,109 v1(-2302,309)
  Bottom Layer w10: R2_42.1@-2439,574.5 -2384.5,520 -2308,520 -2302,514 v1(-2302,309)
NetR2_43_1: R2_43.1 U1_43.5 | length 717.7
  Top Layer w10: U1_43.5@-2130,20.66 -2130,75 -2115,90 -2075,90 -2027,138 -2028,139 v1(-2028,305)
  Bottom Layer w10: R2_43.1@-2161,576.74 -2107.26,523 -2039,523 -2028,512 v1(-2028,305)
NetR2_d1_1: R2_d1.1 U1_d1.5 | length 743.7
  Top Layer w10: U1_d1.5@470.66,1152.96 585.96,1152.96 596,1163 596,1163.11 692.89,1260 v1(840,1260)
  Bottom Layer w10: v1(840,1260) 988,1260 1028,1300 1028,1362.5 R2_d1.1@1072.5,1407
NetR2_d2_1: R2_d2.1 U1_d2.5 | length 757.7
  Top Layer w10: U1_d2.5@470.66,1369.96 530,1369.96 701.04,1541 v1(837.31,1541)
  Bottom Layer w10: v1(837.31,1541) 983,1541 1039,1597 1039,1643.5 R2_d2.1@1073.5,1678
NetR2_d3_1: R2_d3.1 U1_d3.5 | length 840.1
  Top Layer w10: U1_d3.5@470.66,1586.96 522,1586.96 677,1741.96 677,1804 690,1817 v1(830,1817)
  Bottom Layer w10: v1(830,1817) 1000,1817 1036,1853 1036,1922.5 R2_d3.1@1077.5,1964
NetR11_1: R11.1 U6.6 | length 186.9
  Top Layer w10: R11.1@-740,-1004 -705,-1004 -676.18,-975.18 U6.6@-565,-975.18
NetR11_3: R11.3 U6.5 | length 183
  Top Layer w10: R11.3@-740,-969 -710,-969 -690.59,-949.59 U6.5@-565,-949.59
NetR11_5: R11.5 U6.4 | length 180.4
  Top Layer w10: R11.5@-740,-937 -709,-937 -696,-924 U6.4@-565,-924
NetR11_7: R11.7 U6.3 | length 176.5
  Top Layer w10: R11.7@-740,-902 -736.41,-898.41 U6.3@-565,-898.41
NetR13_1: R13.1 U6.9 | length 158.5
  Top Layer w10: U6.9@-346.5,-1026.36 -282.64,-1026.36 v1(-247,-1062)
  Bottom Layer w10: v1(-247,-1062) R13.1@-202.8,-1062
NetR13_3: R13.3 U6.10 | length 155.1
  Top Layer w10: U6.10@-346.5,-1000.77 -273.59,-1000.77 -272,-1002.36 -272,-1003.28 -260.28,-1015 -259.36,-1015 v1(-247.36,-1027)
  Bottom Layer w10: v1(-247.36,-1027) R13.3@-202.8,-1027
NetR13_5: R13.5 U6.11 | length 151.9
  Top Layer w10: U6.11@-346.5,-975.18 -271.82,-975.18 -252,-995 v1(-245,-995)
  Bottom Layer w10: v1(-245,-995) R13.5@-202.8,-995
NetR13_7: R13.7 U6.12 | length 148
  Top Layer w10: U6.12@-346.5,-949.59 -261.41,-949.59 v1(-251,-960)
  Bottom Layer w10: v1(-251,-960) R13.7@-202.8,-960
NetR16_2: R16.2 U17.6 | length 512.2
  Top Layer w10: U17.6@-595,-1306.18 v1(-499,-1306.18)
  Bottom Layer w10: v1(-499,-1306.18) -426.18,-1306.18 -401,-1281 -401,-1187 -361,-1147 R16.2@-203.8,-1147
NetR16_4: R16.4 U17.7 | length 508.4
  Top Layer w10: U17.7@-595,-1331.77 -497.31,-1331.77 v1(-495.04,-1334.04)
  Bottom Layer w10: v1(-495.04,-1334.04) -430,-1334.04 -384,-1288.04 -384,-1197 -369,-1182 R16.4@-203.8,-1182
NetR16_6: R16.6 U17.14 | length 179.1
  Top Layer w10: U17.14@-376.5,-1229.41 -376.09,-1229 v1(-307,-1229)
  Bottom Layer w10: v1(-307,-1229) -302.78,-1229 -297,-1223.22 -213.02,-1223.22 R16.6@-203.8,-1214
NetR16_8: R16.8 U17.13 | length 175.2
  Top Layer w10: U17.13@-376.5,-1255 v1(-323,-1255)
  Bottom Layer w10: v1(-323,-1255) -209.8,-1255 R16.8@-203.8,-1249
NetR17_2: R17.2 U17.12 | length 190.1
  Top Layer w10: U17.12@-376.5,-1280.59 -376.09,-1281 v1(-285,-1281)
  Bottom Layer w10: v1(-285,-1281) -238.62,-1281 -238.21,-1280.59 R17.2@-201.8,-1317
NetR17_4: R17.4 U17.11 | length 193.7
  Top Layer w10: U17.11@-376.5,-1306.18 v1(-324,-1306)
  Bottom Layer w10: v1(-324,-1306) -261.27,-1306 -215.27,-1352 R17.4@-201.8,-1352
NetR17_6: R17.6 U17.10 | length 196.3
  Top Layer w10: U17.10@-376.5,-1331.77 v1(-324,-1331.77)
  Bottom Layer w10: v1(-324,-1331.77) -267.55,-1331.77 -215.32,-1384 R17.6@-201.8,-1384
NetR17_8: R17.8 U17.9 | length 200.2
  Top Layer w10: U17.9@-376.5,-1357.36 v1(-322,-1357.36)
  Bottom Layer w10: v1(-322,-1357.36) -273.95,-1357.36 -212.32,-1419 R17.8@-201.8,-1419
NetR18_7: R18.7 R18.8 R22.2 U7.5 | length 993.5
  Top Layer w10: v1(-542,284) -542,552 -531.59,562.41 U7.5@-493,562.41
  Bottom Layer w10: R18.8@-554,134.2 R18.7@-554,209 R18.7@-542,221 ; v1(-542,284) R18.7@-542,221 ; R22.2@-125,122 -125,222 -541,222 R18.7@-542,221
NetR19_1: R19.1 U2.4 | length 1248.3
  Top Layer w10: v1(463,604) 520.18,604 U2.4@521,603.18 ; v1(714,604) 714,606 931,823 1445,823 1487,865 R19.1@1487,921
  Bottom Layer w10: v1(463,604) 710.36,604 711.18,603.18 712,604 v1(714,604)
NetR19_3: R19.3 U2.6 | length 1145
  Top Layer w10: U2.6@521,654.36 521.36,654 v1(568,654) ; v1(796,656) 796,660 939.21,803.21 1457,803.21 1522,868.21 R19.3@1522,921
  Bottom Layer w10: v1(568,654) 794,654 v1(796,656)
NetR19_7: R19.7 U12.11 | length 1282.3
  Top Layer w10: v1(703.41,578.64) 704,578.05 v1(704,518) ; v1(923,579) 923.23,579 1015.23,487 1258.84,487 1279,507.16 1279,556 1589,866 R19.7@1589,921
  Bottom Layer w10: U12.11@703.41,462.5 704,461.91 v1(704,518) ; v1(703.41,578.64) 703.77,579 v1(923,579)
NetR20_1: R20.1 U2.12 | length 1229.8
  Top Layer w10: U2.12@292.5,577.59 292.91,578 v1(349,578) ; v1(610,576) 609,577 609,733 797,921 R20.1@1285,921
  Bottom Layer w10: v1(349,578) 608,578 v1(610,576)
NetR20_3: R20.3 U2.10 | length 1220.4
  Top Layer w10: U2.10@292.5,628.77 292.73,629 v1(350,629) ; v1(631,633) 626,638 626,723.31 787.69,885 1304,885 1320,901 R20.3@1320,921
  Bottom Layer w10: v1(350,629) 626.54,629 626.77,628.77 v1(631,633)
NetR20_5: R20.5 U2.8 | length 1171.4
  Top Layer w10: U2.8@292.5,679.95 U2.8@292.5,679.95 v1(350,680) ; v1(648,687) 739,687 913,861 1312.54,861 1342.83,891.28 1342.83,911.83 R20.5@1352,921
  Bottom Layer w10: v1(350,680) 638.9,680 638.95,679.95 646,687 v1(648,687)
NetR20_7: R20.7 U2.2 | length 1045.3
  Top Layer w10: U2.2@521,552 652.82,552 666,565.18 666,587 674.07,595.07 ; 675.14,596.14 919,840 1332,840 1387,895 R20.7@1387,921
NetR21_2: R21.2 U10.10 | length 633.8
  Top Layer w10: v1(-697,614.18) -680.18,614.18 -668,602 -668,74 R21.2@-657,63
  Bottom Layer w10: v1@-701.18,614.18 v1(-697,614.18) U10.10@-645,614.18
NetR21_4: R21.4 U10.8 | length 655.2
  Top Layer w10: v1(-645,687) -645,110 -622,87 R21.4@-622,63
  Bottom Layer w10: U10.8@-645,665.36 v1(-645,687)
NetR22_4: R22.4 U7.13 | length 601
  Top Layer w10: U7.13@-264.5,639.18 -195.3,639.18 -195.3,579.43 -185,569.14 -185,194 -160,169 v1(-160,158)
  Bottom Layer w10: R22.4@-160,122 v1(-160,158)
NetR22_6: R22.6 U7.11 | length 517.4
  Top Layer w10: U7.11@-264.5,588 -228,588 -202,562 -202,168 v1(-192,158)
  Bottom Layer w10: R22.6@-192,122 v1(-192,158)
NetR22_8: R22.8 U7.9 | length 462.8
  Top Layer w10: U7.9@-264.5,536.82 -219.59,536.82 -219.59,165.41 v1(-227,158)
  Bottom Layer w10: R22.8@-227,122 v1(-227,158)
NetR23_1: R23.1 U16.12 | length 1759.8
  Top Layer w10: v1(-507,-15) -507,332 -489,350 R23.1@-390.8,350 ; U16.12@676.41,82.5 676,82.09 677,81.09 v1(677,38)
  Bottom Layer w10: v1(-507,-15) -134,-15 -88.04,-60.96 203,-60.96 301.96,38 v1(677,38)
NetR23_3: R23.3 U16.10 | length 1765.1
  Top Layer w10: v1(-482,-37) -482,296 -463,315 R23.3@-390.8,315 ; U16.10@727.59,82.5 728,82.09 v1(728,32)
  Bottom Layer w10: v1(-482,-37) -481,-36 -145,-36 -100,-81 207,-81 305,17 724.18,17 728,20.82 v1(728,32)
NetR23_5: R23.5 U16.8 | length 1777.9
  Top Layer w10: v1(-457,-57) -457,273 -447,283 R23.5@-390.8,283 ; U16.8@778.77,82.5 779,82.27 v1(779,-1)
  Bottom Layer w10: v1(-457,-57) -456,-56 -160,-56 -118,-98 214.8,-98 311.8,-1 v1(779,-1)
NetR23_7: R23.7 U16.2 | length 1625.1
  Top Layer w10: v1(-437,-79) -436,-78 -436,-48.3 -437,-47.3 -437,236 -425,248 R23.7@-390.8,248 ; v1(638,-27) 638,-30.3 650.82,-43.12 U16.2@650.82,-146
  Bottom Layer w10: v1(-437,-79) -187,-79 -185,-77 -147,-115 222.4,-115 317.4,-20 319.4,-22 633,-22 v1(638,-27)
NetR24_1: R24.1 U16.4 | length 534.8
  Top Layer w10: v1(328,-43) R24.1@328,-13 ; U16.4@702,-146 v1(702,-34)
  Bottom Layer w10: v1(328,-43) 331,-40 595,-40 613,-58 644.64,-58 655,-47.64 655,-47.3 668.3,-34 v1(702,-34)
NetR24_3: R24.3 U16.6 | length 524.1
  Top Layer w10: v1(363,-95) R24.3@363,-13 ; U16.6@753.18,-146 v1(753.18,-99.41)
  Bottom Layer w10: v1(363,-95) 368,-100 445.74,-100 446.33,-99.41 565.71,-99.41 569.3,-103 749.59,-103 v1(753.18,-99.41)
NetR24_5: R24.5 U9.12 | length 1007.9
  Top Layer w10: v1(395,-75) R24.5@395,-13 ; v1(578,-82) 578,-675 608,-705 675,-705 685.23,-694.77 U9.12@685.23,-652.5
  Bottom Layer w10: v1(395,-75) 403,-83 438.7,-83 439.7,-82 v1(578,-82)
NetR24_7: R24.7 U9.10 | length 1058.7
  Top Layer w10: v1(430,-62) R24.7@430,-13 ; v1(553,-61) 553,-679 551,-681 593,-723 723,-723 736.41,-709.59 U9.10@736.41,-652.5
  Bottom Layer w10: v1(430,-62) 552,-62 v1(553,-61)
NetR25_3: R25.3 U12.1 | length 954.7
  Top Layer w10: R25.3@361,-245 361,-282 507,-282 531,-258 531,183 v1(538,190)
  Bottom Layer w10: v1(538,190) 538.48,189.52 780.18,189.52 U12.1@780.18,234
NetR25_7: R25.7 U12.5 | length 856.6
  Top Layer w10: R25.7@428,-245 494,-245 512,-227 512,283 559,330 633,330 676,287 v1(676,276)
  Bottom Layer w10: v1(676,276) 676,236.18 678,234.18 U12.5@677.82,234
NetR29_2: R29.2 U10.2 | length 1281
  Top Layer w10: v1(-1350,-372) -1334.7,-372 -821,141.7 v1(-821,537)
  Bottom Layer w10: R29.2@-1439.2,-377 -1434.2,-372 v1(-1350,-372) ; U10.2@-873.5,537.41 -873.09,537 v1(-821,537)
NetR29_4: R29.4 U10.4 | length 1372.7
  Top Layer w10: v1(-1271,-338) -785,148 -785,536.04 -814,565.04 -812,567.04 v1(-812,589)
  Bottom Layer w10: R29.4@-1439.2,-342 -1435.2,-338 v1(-1271,-338) ; U10.4@-873.5,588.59 -873.09,589 v1(-812,589)
NetR29_6: R29.6 U10.6 | length 1346.2
  Top Layer w10: v1(-1361,-313) -1306,-313 -850,143 -850,606.84 v1(-817.07,639.77)
  Bottom Layer w10: R29.6@-1439.2,-310 -1436.2,-313 v1(-1361,-313) ; U10.6@-873.5,639.77 v1(-817.07,639.77)
NetR29_8: R29.8 U10.12 | length 1392.4
  Top Layer w10: v1(-1172,-278) -808,86 -754,86 -701.41,138.59 v1(-701.41,563)
  Bottom Layer w10: R29.8@-1439.2,-275 -1436.2,-278 v1(-1172,-278) ; v1(-701.41,563) U10.12@-645,563
NetR30_1: R30.1 U9.8 | length 1553.5
  Top Layer w10: U9.8@787.59,-652.5 794.09,-659 796.09,-657 798.09,-659 v1(826,-659) ; v1(918,-503) 920,-505 v1(1506,-505)
  Bottom Layer w10: v1(826,-659) 826,-658.11 848,-636.11 848,-573 v1(918,-503) ; v1(1506,-505) 1506,-504 1522,-488 1522,178 R30.1@1549,205
NetR30_3: R30.3 U9.2 | length 2236.5
  Top Layer w10: U9.2@659.64,-881 659.64,-954.64 814,-1109 v1(834,-1109)
  Bottom Layer w10: v1(834,-1109) 1266,-1109 1485,-890 1485,221 1504,240 R30.3@1549,240
NetR30_5: R30.5 U9.4 | length 2116.8
  Top Layer w10: U9.4@710.82,-881 710.82,-934.82 736,-960 807,-960 819,-948 v1(819,-942)
  Bottom Layer w10: v1(819,-942) 978,-942 982,-938 992,-948 1020,-920 1107,-1007 1270,-1007 1463,-814 1463,244.73 1490.27,272 R30.5@1549,272
NetR30_7: R30.7 U9.6 | length 1930.5
  Top Layer w10: v1(762,-934) U9.6@762,-881
  Bottom Layer w10: v1(762,-934) 794.8,-934 828.42,-900.38 1271.62,-900.38 1438,-734 1438,250 1495,307 R30.7@1549,307
NetR31_2: R31.2 U13.1 | length 282.1
  Bottom Layer w10: U13.1@-1609.5,514.23 -1609.5,372.5 -1591,354 R31.2@-1476.8,354
NetR31_4: R31.4 U13.3 | length 386.1
  Top Layer w10: v1(-1561,322) -1558,322 v1(-1558,565)
  Bottom Layer w10: U13.3@-1609.5,565.41 -1609.09,565 v1(-1558,565) v1@-1555,565 ; v1(-1561,322) -1479.8,322 R31.4@-1476.8,319
NetR32_6: R32.6 U21.2 | length 954.2
  Top Layer w10: U21.2@-1230.5,642.18 -1169,642.18 -1150,623.18 -1150,380 -1220,310 -1218,308 v1(-1218,40) ; R32.6@-1071.2,44 -1069.2,42 v1(-1019,42)
  Bottom Layer w10: v1(-1218,40) -1021,40 v1(-1019,42)
NetR32_8: R32.8 U21.4 | length 941.3
  Top Layer w10: v1(-1240,9) -1240,314.04 -1168,386.04 -1168,577 -1182,591 U21.4@-1230.5,591 ; R32.8@-1071.2,9 v1(-1018,9)
  Bottom Layer w10: v1(-1240,9) v1(-1018,9)
NetR33_2: R33.2 U21.6 | length 632.5
  Top Layer w10: v1(-1266,212) -1266,315 -1185,396 -1185,532 -1192.82,539.82 U21.6@-1230.5,539.82
  Bottom Layer w10: v1(-1266,212) -1263,215 -1068,215 R33.2@-1068,246
NetR33_4: R33.4 U21.12 | length 473.8
  Top Layer w10: v1(-1023,279) -1056,279 -1058.41,281.41 -1058.41,616.59 U21.12@-1002,616.59
  Bottom Layer w10: R33.4@-1068,281 -1066,279 v1(-1023,279)
NetR33_6: R33.6 U21.10 | length 415.9
  Top Layer w10: U21.10@-1002,565.41 v1(-947.41,565.41)
  Bottom Layer w10: R33.6@-1068,313 -968,313 -948,333 -947.41,333 v1(-947.41,565.41)
NetR33_8: R33.8 U21.8 | length 222.3
  Top Layer w10: v1(-1002,488.67) U21.8@-1002,514.23
  Bottom Layer w10: R33.8@-1068,348 -1019,348 -1002,365 v1(-1002,488.67)
NetR37_8: R37.8 U15.11 | length 511.5
  Top Layer w10: v1(481.8,-934.8) 711.62,-1164.62 v1(711.62,-1215)
  Bottom Layer w10: R37.8@413,-934.8 v1(481.8,-934.8) ; U15.11@710.82,-1282 710.82,-1215.8 v1(711.62,-1215)
NetR41_1: R41.1 U14.3 | length 319.5
  Top Layer w10: v1(-59,569) -59,543.41 -67,535.41 -67,343 R41.1@-25,343
  Bottom Layer w10: U14.3@-107,569.41 -106.59,569 v1(-59,569)
NetR41_3: R41.3 U14.5 | length 434.4
  Top Layer w10: v1(-60,621) -89,592 -89,311 -86,308 R41.3@-25,308
  Bottom Layer w10: U14.5@-107,620.59 -60.41,620.59 v1(-60,621)
NetR41_5: R41.5 U14.13 | length 475.8
  Top Layer w10: v1(-69,276) R41.5@-25,276 ; v1(-2,378) 23.28,378 36,390.72 36,480.38 62,506.38 v1(62,544)
  Bottom Layer w10: v1(-69,276) -69,371 -62,378 v1(-2,378) ; v1(62,544) 121.32,544 U14.13@121.5,543.82
NetR41_7: R41.7 U14.11 | length 604.2
  Top Layer w10: v1(-93,241) R41.7@-25,241 ; v1(15,400) 15,484.23 29.5,498.73 30.31,498.73 39,507.42 39,583 v1(51,595)
  Bottom Layer w10: v1(-93,241) -93,380 -73,400 v1(15,400) ; v1(51,595) U14.11@118,595 U14.11@121.5,595
NetR42_1: R42.1 U15.9 | length 128.7
  Top Layer w10: v1(758,-1356) R42.1@811,-1356
  Bottom Layer w10: v1(758,-1356) 762,-1352 U15.9@762,-1282
NetR95_2: R95.2 U22.4 | length 157.6
  Top Layer w10: R95.2@-747.6,-551 -687.7,-551 -646.61,-509.91 U22.4@-607,-509.91
NetR96_2: R96.2 U22.6 | length 171.6
  Top Layer w10: R96.2@-747.6,-636 -721,-636 -646.09,-561.09 U22.6@-607,-561.09
NetR97_1: R97.1 U22.10 | length 137.3
  Top Layer w10: U22.10@-378.5,-535.5 -272.73,-535.5 R97.1@-250.4,-557.83
NetR98_1: R98.1 U22.8 | length 152.7
  Top Layer w10: U22.8@-378.5,-586.68 -309.72,-586.68 R98.1@-250.4,-646
NetR99_2: R99.2 U51.2 | length 144.2
  Top Layer w10: U51.2@-1988,-872 -1900.4,-872 R99.2@-1860.4,-832
NetR182_1: R182.1 U51.5 | length 132.8
  Top Layer w10: R182.1@-2294,-696 -2218,-772 U51.5@-2192.72,-772
NetR183_1: R183.1 R184.1 U51.6 | length 183
  Top Layer w10: R184.1@-2294,-770 R183.1@-2294,-843 -2273,-822 U51.6@-2192.72,-822
PGND_1: C3_11.1 C3_12.1 C3_13.1 Q2_11.3 Q2_12.3 Q2_13.3 U1_1.1 U1_1.2 | length 1272.6
  Bottom Layer w30: C3_11.1@-2509,1313.5 C3_11.1@-2509,1327.5 ; C3_12.1@-2509,1370.5 C3_11.1@-2509,1327.5 ; U1_1.2@-2501.34,1553 -2421,1553 ; U1_1.1@-2501.34,1603 -2421.5,1603 -2421,1603.5 ; Q2_11.3@-2328.84,1455 -2397,1455 -2421,1479 ; Q2_12.3@-2328.84,1733.92 -2415.08,1733.92 -2421,1728 ; Q2_13.3@-2328.84,2020.96 -2385.04,2020.96 -2421,1985 -2421,1728 ; C3_11.1@-2509,1327.5 -2421,1415.5 -2421,1479 ; -2421,1479 -2421,1553 ; -2421,1553 -2421,1603.5 ; -2421,1603.5 -2421,1728
  Bottom Layer w40: C3_13.1@-2509,1256.5 C3_11.1@-2509,1313.5
PGND_2: C3_21.1 C3_22.1 C3_23.1 Q2_21.3 Q2_22.3 Q2_23.3 U1_2.1 U1_2.2 | length 2753
  Bottom Layer w30: C3_22.1@1491,1223.37 1491.5,1223.87 C3_23.1@1491.5,1333 1572,1333 1576,1329 ; U1_2.2@1504,1506 1574,1506 1576,1508 ; U1_2.1@1504,1556 1574,1556 1576,1558 1576,1508 ; Q2_22.3@2504,1835 2572,1835 2600,1807 2600,1558 ; Q2_21.3@2505,1278.08 2597.08,1278.08 2600,1281 ; Q2_23.3@2505,1558 2600,1558 ; 1576,1329 1576,1508 ; 1576,1329 1576,1111 1593,1094 1928,1094 2033,1199 2571,1199 2600,1228 2600,1281 ; 2600,1281 2600,1558